# EAGLE board Fotopletis_Design (EAGLE 6.5.0)
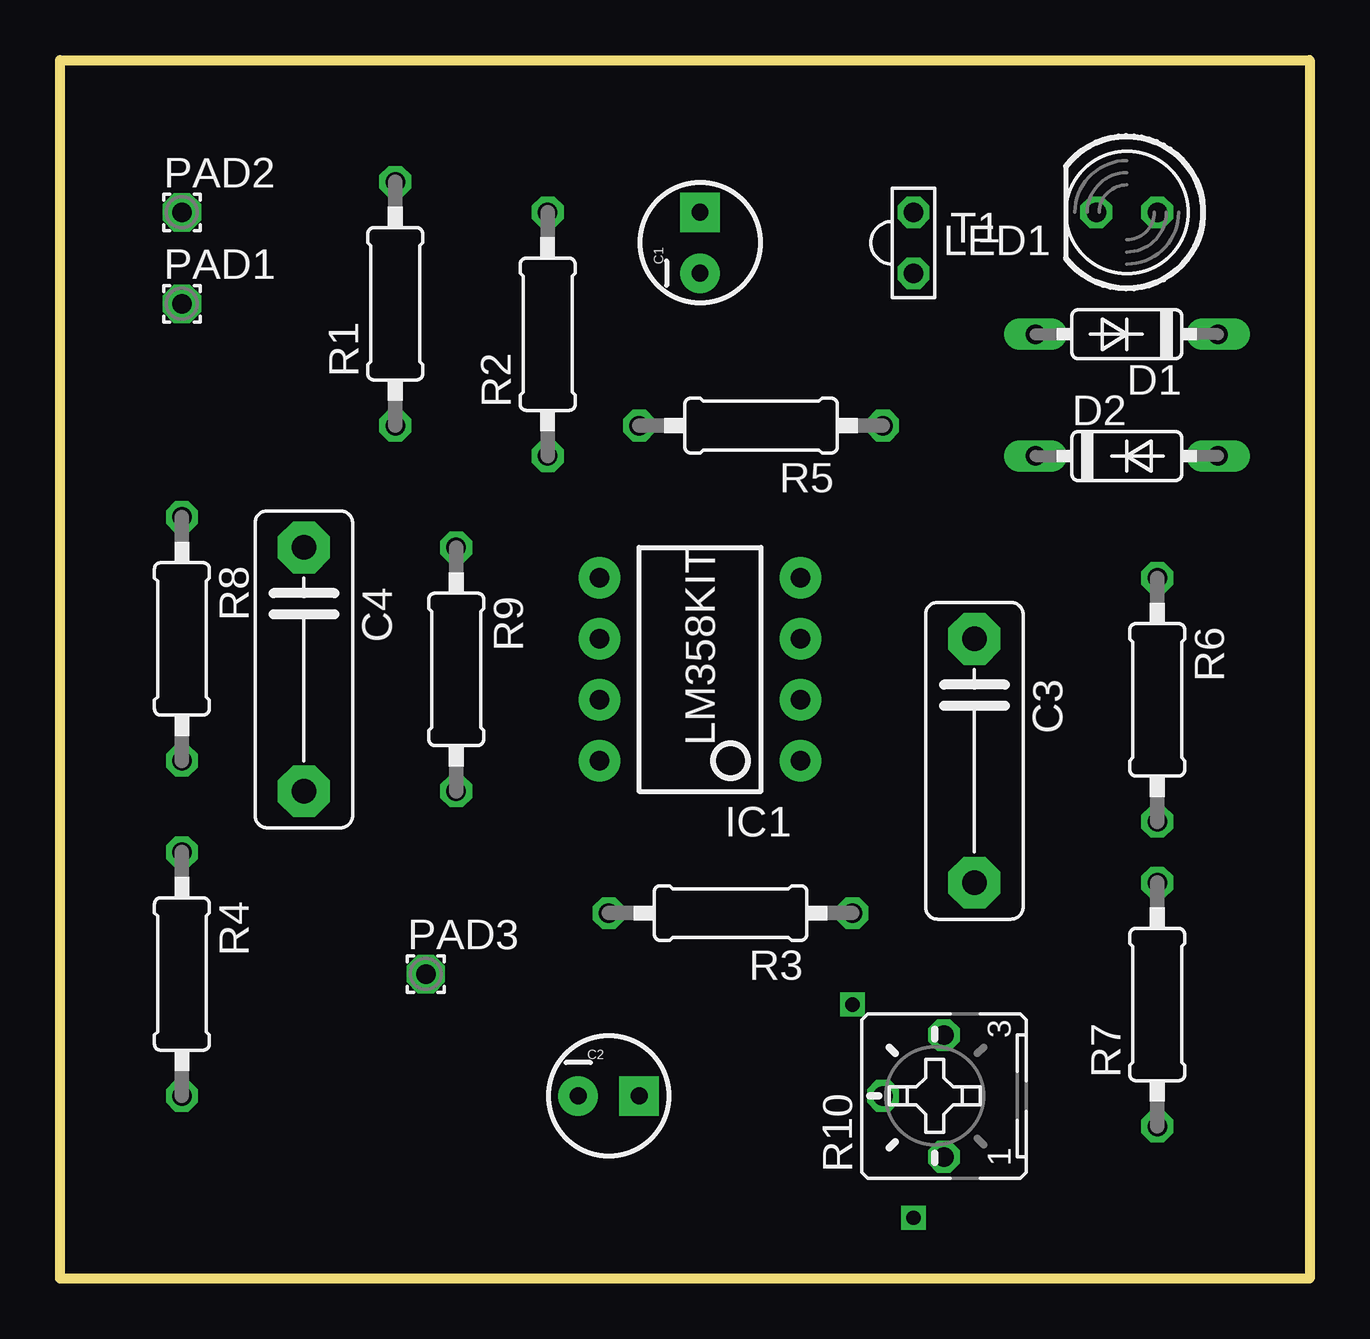
[diagram p0: board, top side]
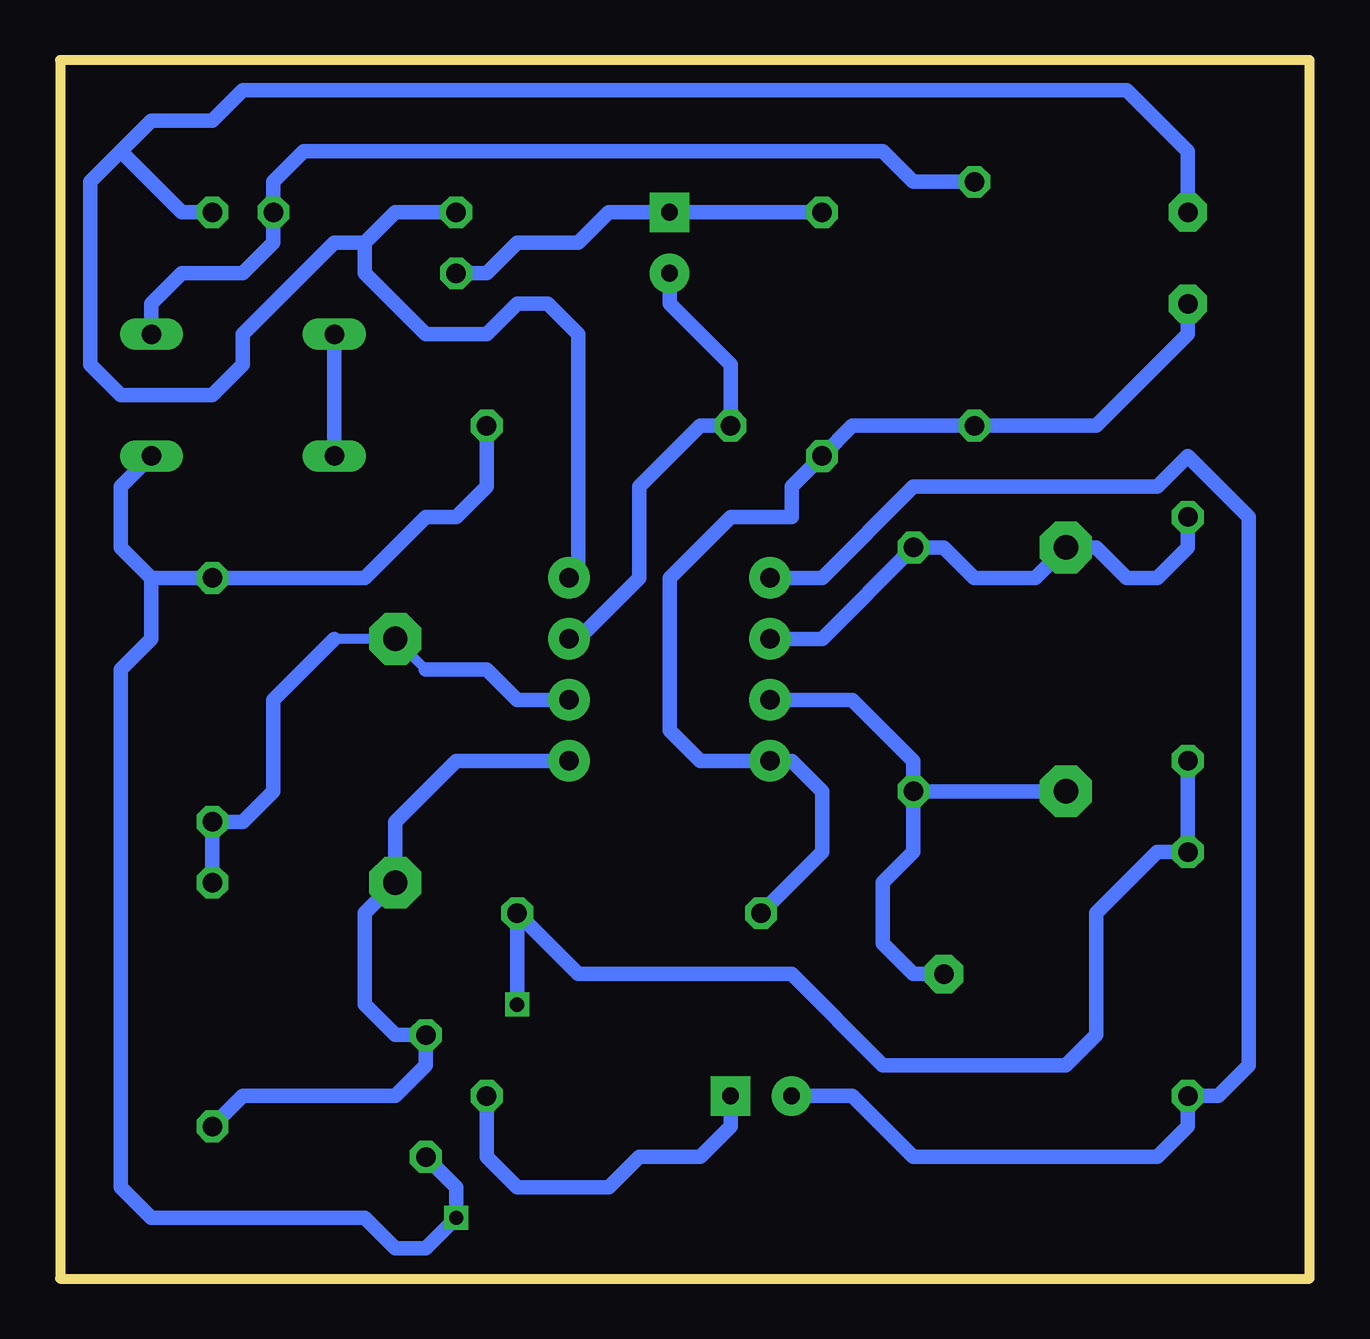
[diagram p1: board, bottom side, seen from below]

Size 52.07 x 50.8 mm. Coordinates in mm from the lower left corner, seen from the top.
Outline: 0,0 0,50.8 52.07,50.8 52.07,0 0,0
Copper layers (1*16): Top 0.035mm / dielectric 1.5mm / Bottom 0.035mm
Design rules "default": minimum track width 10mil, minimum drill 24mil, track to track 8mil, track to pad 8mil, pad to pad 8mil, via to via 8mil, smd to smd 8mil, copper to edge 40mil, drill to drill 8mil, minimum pad ring 10mil, minimum via ring 8mil, stop-mask expansion 4mil, vias tented up to drill 0mil, thermal gap 10mil

## Footprints (pad centres in the part's own frame; a part is rotated, then mirrored left to right if it is on the bottom)
CPOL-RADIAL-10UF-25V = drill 0.7 pad 1.651 square: 1 1.27,0 | drill 0.7 pad 1.651: 2 -1.27,0
C10B4 = drill 1.016 pad 2.159 octagon: 1 -5.08,0; 2 5.08,0
DO35-7 = drill 0.813 long: A 3.81,0; C -3.81,0
DIP08-KIT = drill 0.813 pad 1.727: 1 -3.81,-4.191; 2 -1.27,-4.191; 3 1.27,-4.191; 4 3.81,-4.191; 5 3.81,4.191; 6 1.27,4.191; 7 -1.27,4.191; 8 -3.81,4.191
LED5MM = drill 0.813 octagon: A -1.27,0; K 1.27,0
1,6/0,8 = drill 0.813 pad 1.6 octagon: 1 0,0
0207/10 = drill 0.813 octagon: 1 -5.08,0; 2 5.08,0
B25P = drill 0.813 octagon: A -2.54,0; E 2.54,0; S 0,2.54
LPT80A = drill 0.813 octagon: C 0,-1.27; E 0,1.27

## Placement (x,y rotation side)
C1  2.2uF  [CPOL-RADIAL-10UF-25V]  26.67,43.18 90 top
C2  2.2uF  [CPOL-RADIAL-10UF-25V]  22.86,7.62 0 top
C3  68nF  [C10B4]  38.1,21.59 270 top
C4  68nF  [C10B4]  10.16,25.4 270 top
D1  1N4148DO35-7  [DO35-7]  44.45,39.37 180 top
D2  1N4148DO35-7  [DO35-7]  44.45,34.29 0 top
IC1  LM358KIT  [DIP08-KIT]  26.67,25.4 90 top
LED1  [LED5MM]  44.45,44.45 180 top
PAD1  [1,6/0,8]  5.08,40.64 0 top
PAD2  [1,6/0,8]  5.08,44.45 0 top
PAD3  [1,6/0,8]  15.24,12.7 0 top
R1  120  [0207/10]  13.97,40.64 90 top
R2  22k  [0207/10]  20.32,39.37 90 top
R3  4.7k  [0207/10]  27.94,15.24 180 top
R4  4.7k  [0207/10]  5.08,12.7 270 top
R5  4.7k  [0207/10]  29.21,35.56 180 top
R6  10k  [0207/10]  45.72,24.13 270 top
R7  1M  [0207/10]  45.72,11.43 90 top
R8  10k  [0207/10]  5.08,26.67 270 top
R9  1M  [0207/10]  16.51,25.4 270 top
R10  10K  [B25P]  36.83,7.62 90 top
T1  LPT80A  [LPT80A]  35.56,43.18 0 top

## Library data of the parts
C1 C2 D1 D2 = Fotopletis(1)
C3 C4 = capacitor-wima
IC1 = Fotopletis(1); PROD_ID: IC-09172
LED1 = led
PAD1-PAD3 = Fotopletis
R1-R9 = rcl
R10 = pot
T1 = Fotopletis(1); OC_FARNELL: unknown; OC_NEWARK: unknown

## Nets
S$1: D1.C LED1.K R1.2
S$2: C4.1 R8.1 R9.1
S$3: C2.2 R4.2
S$4: R3.1 R4.1 R8.2
S$5: C2.1 R10.S
S$7: PAD1.1 R1.1 R2.1 R3.2
S$8: C4.2 PAD3.1 R9.2
S$11: C3.1 R6.2 R7.2
S$13: D1.A D2.C
S$14: C1.1 R2.2 T1.C
S$15: D2.A R5.1 R6.1 R10.A
S$16: C1.2 R5.2
S$17: C3.2 R7.1 R10.E
S$18: LED1.A PAD2.1 T1.E

## Tracks (layer width: path | path; a pad name or v marks a point on that pad's centre or on a via)
S$1
  Bottom 0.61: R1.2 16.51,45.72 17.78,46.99 41.91,46.99 43.18,45.72 LED1.K 43.18,43.18 44.45,41.91 46.99,41.91 48.26,40.64 D1.C
S$2
  Bottom 0.61: 22.86,26.67 20.32,26.67 R9.1 15.24,30.48 13.97,29.21 11.43,29.21 C4.1 8.89,30.48 7.62,29.21 6.35,29.21 5.08,30.48 R8.1
S$3
  Bottom 0.61: 22.86,29.21 20.32,29.21 16.51,33.02 6.35,33.02 5.08,34.29 2.54,31.75 2.54,8.89 3.81,7.62 R4.2 5.08,6.35 6.35,5.08 16.51,5.08 19.05,7.62 C2.2
S$4  (via drill 0.6)
  Bottom 0.61: R8.2 R4.1 6.35,17.78 8.89,15.24 8.89,10.16 10.16,8.89 17.78,8.89 21.59,12.7 30.48,12.7 R3.1 v33.02,11.43
S$5
  Bottom 0.61: C2.1 24.13,6.35 25.4,5.08 27.94,5.08 29.21,3.81 33.02,3.81 34.29,5.08 R10.S
S$7
  Bottom 0.61: PAD1.1 5.08,39.37 8.89,35.56 R1.1 19.05,35.56 R2.1 21.59,33.02 21.59,31.75 24.13,31.75 26.67,29.21 26.67,22.86 25.4,21.59 21.59,21.59 20.32,20.32 20.32,17.78 R3.2
S$8
  Bottom 0.61: C4.2 R9.2 | R9.2 16.51,17.78 17.78,16.51 17.78,13.97 16.51,12.7 PAD3.1 | R9.2 16.51,21.59 19.05,24.13 22.86,24.13
S$11
  Bottom 0.406: 40.64,26.67 C3.1 36.83,25.4
  Bottom 0.61: 30.48,24.13 33.02,24.13 34.29,25.4 36.83,25.4 | 40.64,26.67 43.18,24.13 43.18,20.32 44.45,19.05 R6.2 R7.2
S$13
  Bottom 0.61: D2.C D1.A
S$14
  Bottom 0.406: 22.86,44.45 C1.1 29.21,44.45
  Bottom 0.61: T1.C 34.29,41.91 33.02,43.18 30.48,43.18 29.21,44.45 R2.2
S$15  (via drill 0.6)
  Bottom 0.406: 39.37,29.21 R6.1 48.26,29.21
  Bottom 0.61: R10.A 35.56,3.81 v35.56,2.54 36.83,1.27 38.1,1.27 39.37,2.54 48.26,2.54 49.53,3.81 49.53,25.4 48.26,26.67 48.26,29.21 | 48.26,29.21 49.53,30.48 49.53,33.02 D2.A | R5.1 34.29,33.02 35.56,31.75 36.83,31.75 39.37,29.21 48.26,29.21
S$16
  Bottom 0.61: C1.2 26.67,40.64 24.13,38.1 R5.2 25.4,35.56 27.94,33.02 27.94,29.21 30.48,26.67
S$17
  Bottom 0.61: 30.48,21.59 35.56,21.59 38.1,19.05 C3.2 39.37,15.24 39.37,11.43 38.1,10.16 R10.E 36.83,8.89 38.1,7.62 44.45,7.62 R7.1
S$18
  Bottom 0.61: 30.48,29.21 30.48,39.37 31.75,40.64 33.02,40.64 34.29,39.37 36.83,39.37 39.37,41.91 39.37,43.18 | 39.37,43.18 38.1,44.45 T1.E | 49.53,46.99 48.26,48.26 45.72,48.26 44.45,49.53 7.62,49.53 5.08,46.99 PAD2.1 | 49.53,46.99 46.99,44.45 LED1.A | 49.53,46.99 50.8,45.72 50.8,38.1 49.53,36.83 45.72,36.83 44.45,38.1 44.45,39.37 40.64,43.18 39.37,43.18